# Altium PCB PoBoI.PcbDoc (part 4 of 4)
Units mm, origin at the board's own origin, x right, y up, seen from the top; angles counter-clockwise.
Board outline 90.25 x 95.8 mm, 4 copper layers (Top Layer, GND Layer, PWR Layer, Bottom Layer), stack 1.537 mm thick; 250 components, 177 nets, 942 pads, 25 vias.
Unrouted connection lines stored in the file: 192.
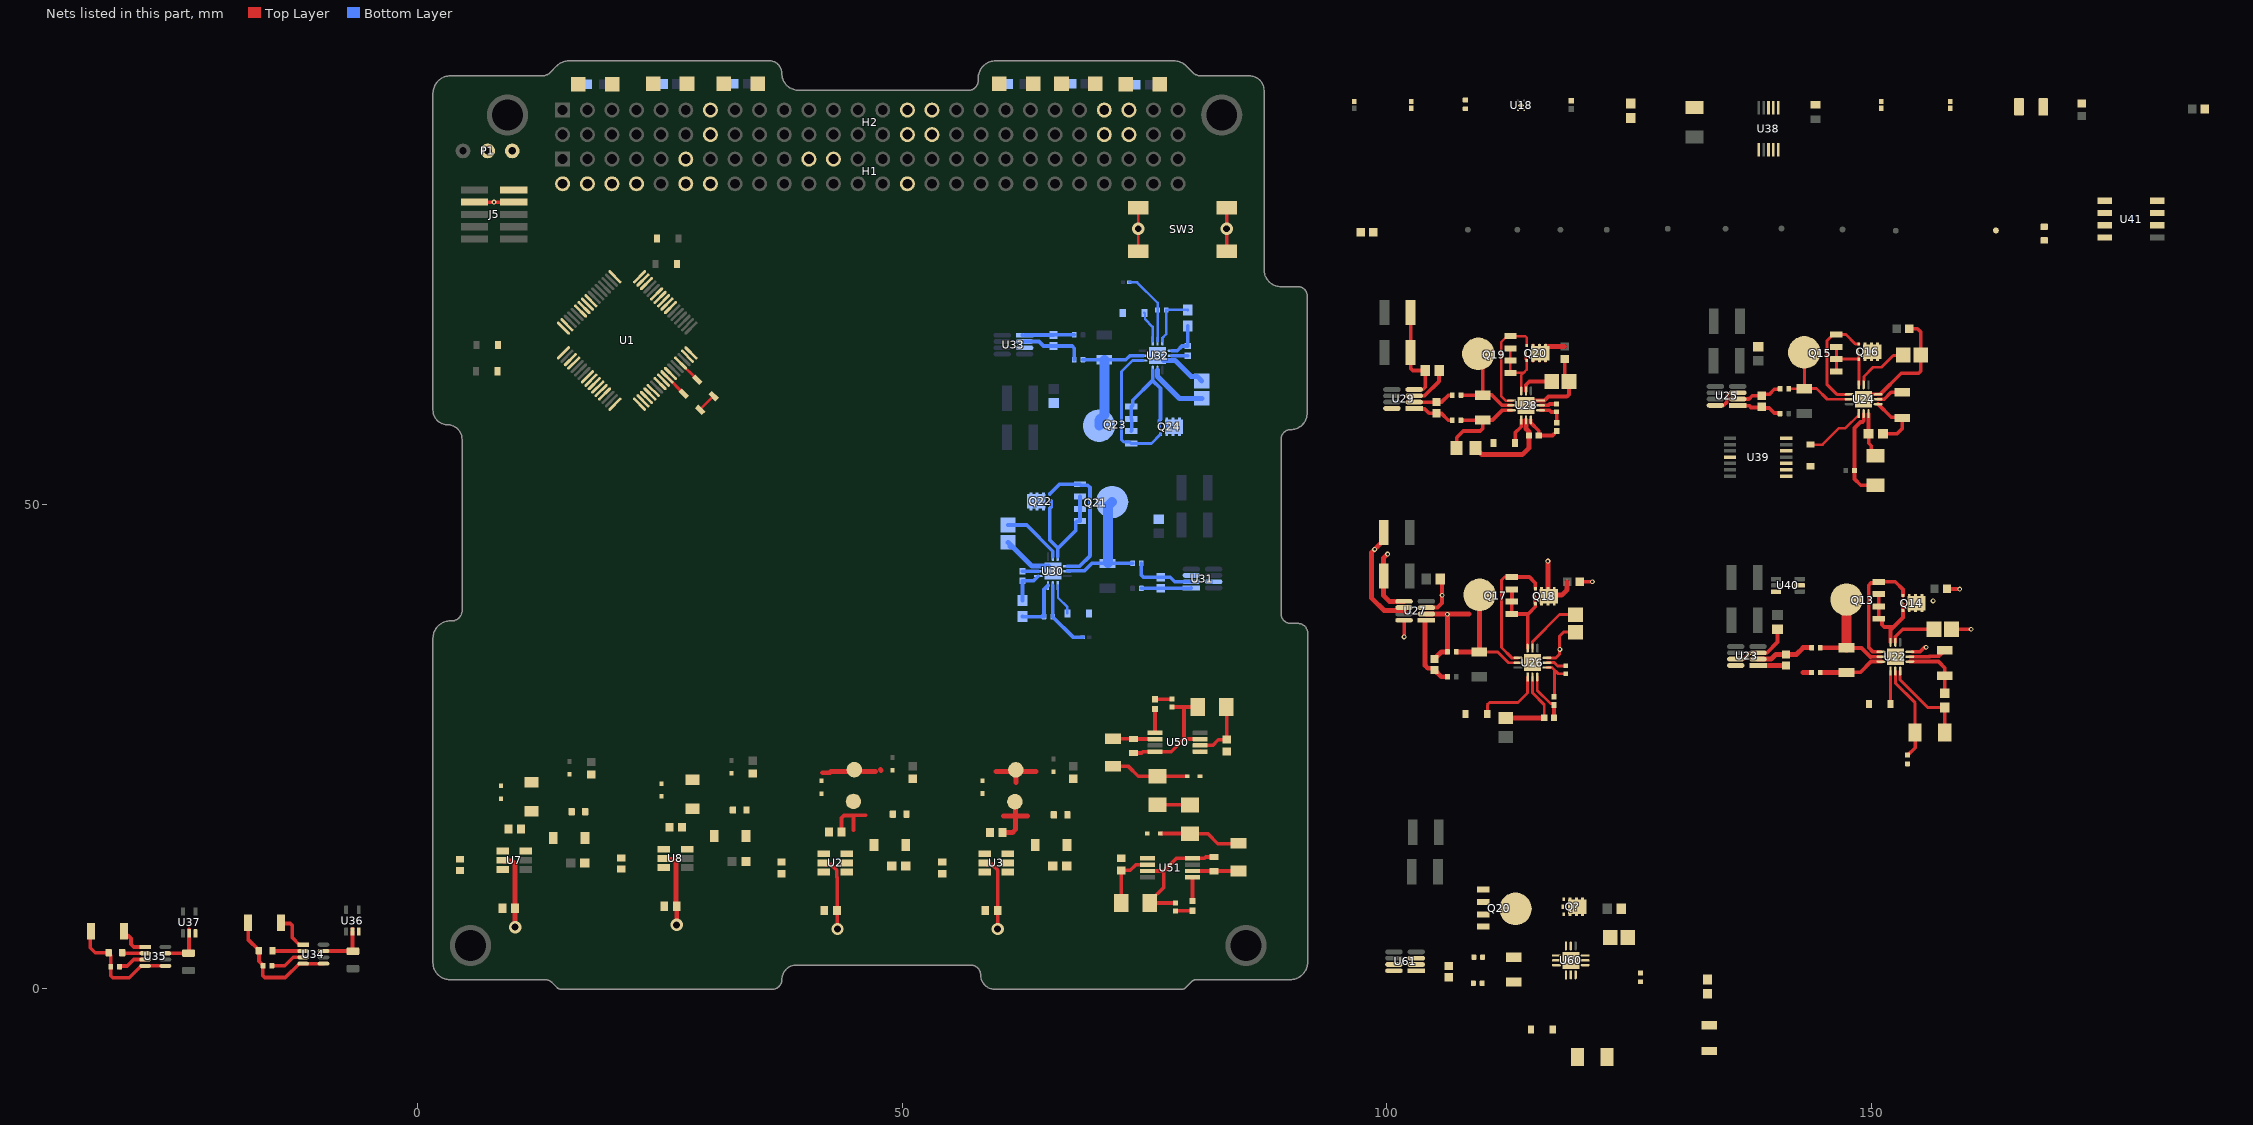
[diagram p4: the nets of this part, all layers, seen from the top]

## Polygon pours and split planes (outlines as drawn) (continued)
SW_2 on Top Layer "GND" (solid, remove dead copper, pour order 29): 29.705,16.891 31.636,16.891 31.636,13.97 27.038,13.97 27.038,19.71 29.705,19.71
GND on Top Layer "Top Layer-GND" (solid, remove dead copper, pour order 28): 35.662,12.294 33.325,12.294 33.325,16.815 33.528,16.815 33.528,22.657 35.662,22.657
BOOST_2 on Top Layer "GND" (solid, remove dead copper, pour order 27): 26.162,13.97 26.162,20.269 24.232,20.269 24.232,14.021 24.232,13.97
GND on Top Layer "Top Layer-GND" (solid, remove dead copper, pour order 24): 18.999,12.167 16.662,12.167 16.662,16.688 16.866,16.688 16.866,22.53 18.999,22.53
3V3_1 on Top Layer "Top Layer-3V3_1" (solid, remove dead copper, pour order 22): 13.741,17.501 16.612,17.501 16.612,22.53 3.759,22.53 3.759,12.929 5.334,12.929 5.334,20.549 13.741,20.549
BOOST_1 on Top Layer "GND" (solid, remove dead copper, pour order 17): 9.55,13.767 9.55,20.066 7.62,20.066 7.62,13.818 7.569,13.767
SW_1 on Top Layer "GND" (solid, remove dead copper, pour order 16): 13.081,16.688 15.011,16.688 15.011,13.767 10.414,13.767 10.414,19.507 13.081,19.507
GND on GND Layer (split plane): 504 vertices, not listed, extent 2.111,0.468 91.342,95.25
no net on PWR Layer (split plane): 504 vertices, not listed, extent 2.111,0.468 91.342,95.25

## Silkscreen, mask and mechanical layers (free items; w line width, h text height)
Top Overlay:
  region: 1143 vertices and 187 holes, not listed, extent -26.56,40.033 3.338,48.224
  text "SSRL UGA / LEARNSat_POBOI  / Matthew Fernandez / Pranav Sutraway" at -22.469,48.641 h1

## Text inside footprints (layer, text, board x,y; h text height)
U38: Mechanical 13 "*" at 139.442,86.995 h1.88 r90; Mechanical 13 "*" at 139.442,86.995 h1.88 r90